# Altium PCB 电源板PCB.PcbDoc
Units mil, origin at the board's own origin, x right, y up, seen from the top; angles counter-clockwise.
Board outline 6000 x 4000 mil, 2 copper layers (Top Layer, Bottom Layer); 30 components, 22 nets, 76 pads, 0 vias.
Unrouted connection lines stored in the file: 54.
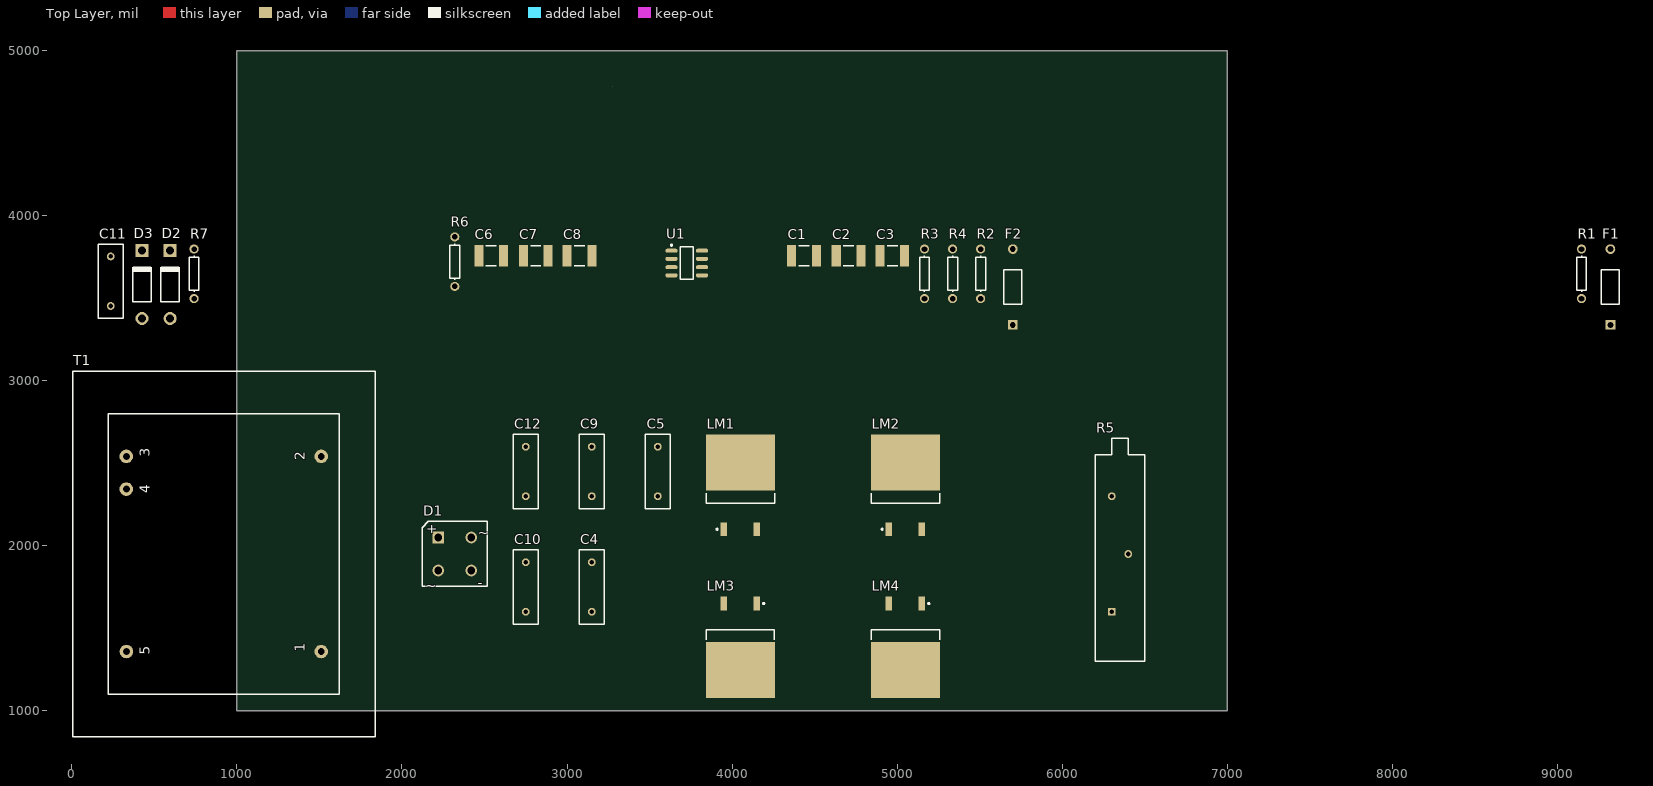
[diagram p0: Top Layer view]
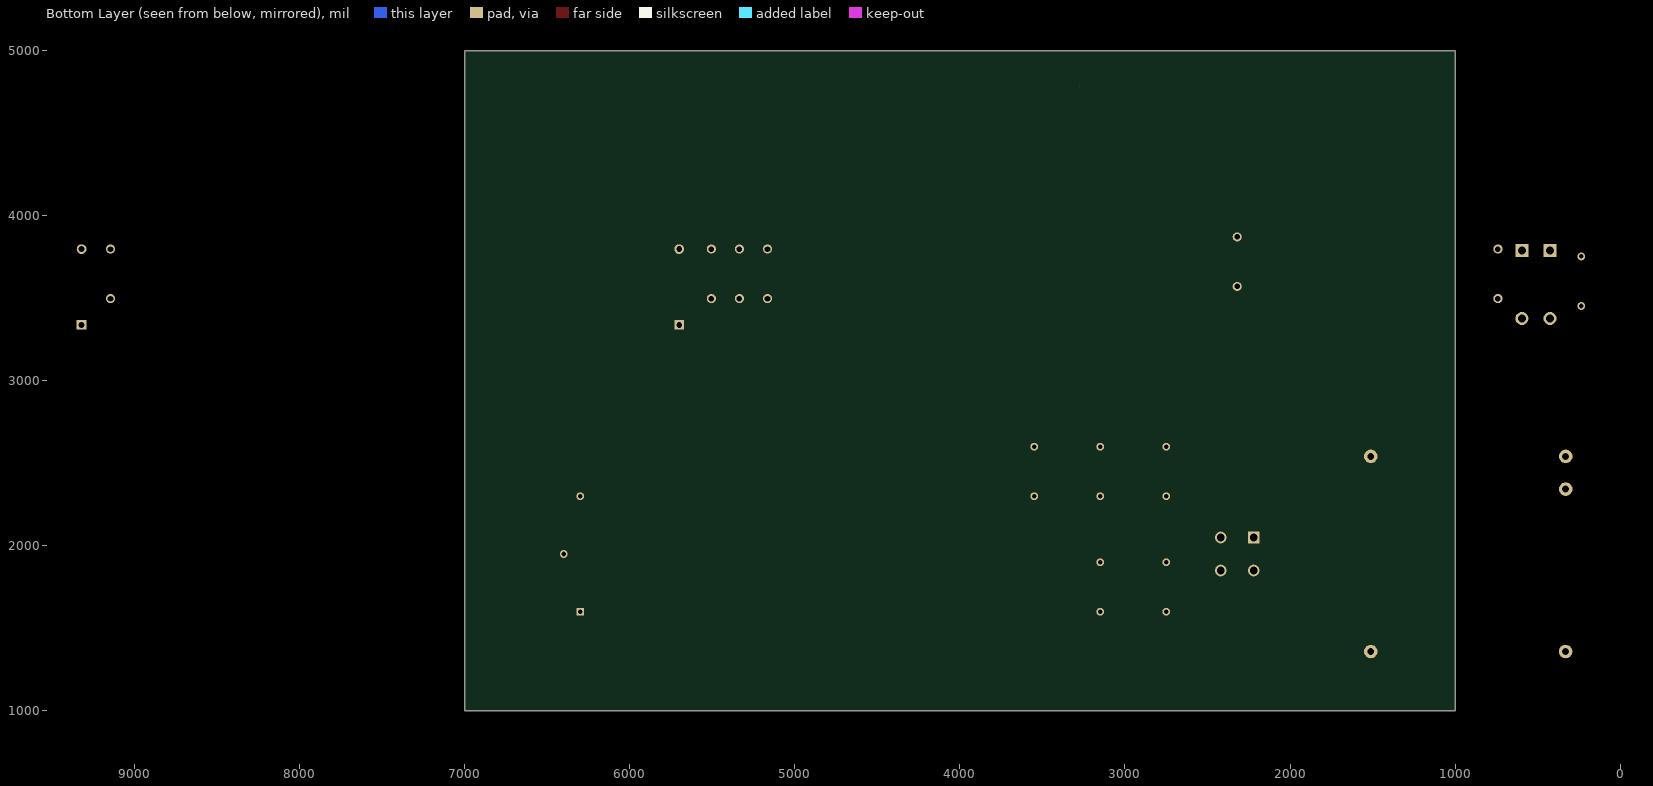
[diagram p1: Bottom Layer view, seen from below]

## Layer stack, top to bottom
Top Solder: solder mask 0.4, Solder Resist, Dk 3.5
Top Layer: signal copper 1.4
Dielectric 1: dielectric 12.6, FR-4, Dk 4.8
Bottom Layer: signal copper 1.4
Bottom Solder: solder mask 0.4, Solder Resist, Dk 3.5

## Board outline
1000,1000 7000,1000 7000,5000 1000,5000
cut-out: 3275,4780

## Design rules (kind name [scope] priority, off if disabled: settings)
Clearance [All] p1: gap=10 ignorepadtopadclearanceinfootprint=FALSE except(0: Arc-Hole Track-Hole SMDPad-Hole THPad-Hole Via-Hole Fill-Hole Poly-Hole Region-Hole Text-Hole)
PolygonConnect [All] p1: connectstyle=Relief reliefconductorwidth=10 reliefentries=4 polygonreliefangle="90 Angle" airgapwidth=10
RoomDefinition 电源板原理图 [InComponentClass('电源板原理图')] p1: confinementstyle=ConfineIn formatcopy=TRUE outline -24.58,-33.33 8760,-33.33 8760,300 -24.58,300
RoutingVias [All] p1: holewidth=28 width=50 viastyle="Through Hole" minholewidth=28 minwidth=50 maxholewidth=28 maxwidth=50
SolderMaskExpansion [All] p1: expansion=4
Width [All] p1: maxlimit=10 minlimit=10 preferedwidth=10
30 further rules are at their usual default settings.

## Components (designator, comment, footprint, x,y, rotation, side; value= is the part's Value field where it differs from the comment)
C1 "Cap Pol3" 1812 4435.42,3757.41 r0 top value=100pF
C2 "Cap Pol3" 1812 4705.42,3757.41 r0 top value=100pF
C3 "Cap Pol3" 1812 4970.42,3757.41 r0 top value=100pF
C4 "Cap" RAD-0.3 3150,1750 r90 top value=100pF
C5 "Cap" RAD-0.3 3550,2450 r90 top value=100pF
C6 "Cap Pol3" 1812 2540.42,3757.41 r0 top value=100pF
C7 "Cap Pol3" 1812 2810.42,3757.41 r0 top value=100pF
C8 "Cap Pol3" 1812 3075.42,3757.41 r0 top value=100pF
C9 "Cap" RAD-0.3 3150,2450 r90 top value=100pF
C10 "Cap" RAD-0.3 2750,1750 r90 top value=100pF
C11 "Cap" RAD-0.3 235.42,3602.41 r90 top value=100pF
C12 "Cap" RAD-0.3 2750,2450 r90 top value=100pF
D1 "Bridge1" D-38 2320,1950 r0 top
D2 "Diode 1N4007" DO-41 595.42,3582.41 r90 top
D3 "Diode 1N4007" DO-41 425.42,3582.41 r90 top
F1 "0.5A" PIN-W2/E2.8 9320.42,3567.41 r90 top
F2 "0.5A" PIN-W2/E2.8 5700.42,3567.41 r90 top
LM1 "LM7812" D2PAK_L 4050.42,2365.75 r90 top
LM2 "LM7805" D2PAK_L 5050,2365.75 r90 top
LM3 "LM7912" D2PAK_L 4050,1384.25 r270 top
LM4 "LM7905" D2PAK_L 5050,1384.25 r270 top
R1 "Res1" AXIAL-0.3 9145.42,3647.41 r90 top value=100
R2 "Res1" AXIAL-0.3 5505.42,3647.41 r90 top value=100
R3 "Res1" AXIAL-0.3 5165.42,3647.41 r90 top value=500
R4 "Res1" AXIAL-0.3 5335.42,3647.41 r90 top value=1K
R5 "Res Tap" VR3 6350,1950 r90 top value=1K
R6 "Res1" AXIAL-0.3 2320,3720.75 r90 top value=500
R7 "Res1" AXIAL-0.3 740.42,3647.41 r90 top value=1K
T1 "Trans CT Ideal" TRF_5 920.5,1950 r90 top
U1 "NE555D" D008_L 3725.42,3712.41 r0 top

## Footprints (in the part's own frame and the unit in brackets; to place one, negate y for a bottom-side part, rotate by r counter-clockwise, add the part's x,y. Pads: shape width x height; smd on the part's side, far side on the other; paste and mask are expansions set on the pad)
1812 [mm] "Chip Capacitor, Body 4.5x3.2mm, IPC High Density"
  rect 1.4x3.3 smd: 1(-1.9,0) 2(1.9,0)
  silkscreen extent -0.8,-1.55 0.8,1.55, body extent -2.4,-1.7 2.4,1.7, height 1.4
AXIAL-0.3 [mm] "Axial Device, Thru-Hole; 2 Leads; 0.3 in Pin Spacing"
  round 1.4 hole 0.85: 1(-3.81,0) 2(3.81,0)
  silkscreen extent -2.77,-0.76 2.77,0.76
D2PAK_L [mm] "D2-PAK, 4-Leads, Body 8.8x10.4mm, Pitch 2.54mm, Lead Span 15.1mm, IPC High Density"
  rect 2.1x1 smd: 1(-6.75,2.54) 3(-6.75,-2.54)
  rect 8.6x10.6 smd: 2(3.5,0)
  silkscreen extent -6.87,-5.25 -1.2,5.25, body extent -2.75,-5.28 6.25,5.28, height 4.69
D008_L [mm] "SOIC, 8-Leads, Body 4.9x3.9mm, Pitch 1.27mm, IPC High Density"
  oval 1.9x0.6 smd: 1(-2.35,1.905) 2(-2.35,0.635) 3(-2.35,-0.635) 4(-2.35,-1.905) 5(2.35,-1.905) 6(2.35,-0.635) 7(2.35,0.635) 8(2.35,1.905)
  silkscreen extent -2.47,-2.5 1,2.88, body extent -1.95,-2.45 1.95,2.45, height 1.75
D-38 [mm] "Bridge Rectifier; 4 Terminals; Body 9.4 x 9.4 mm (typ); Pitch 5.08 mm"
  rect 1.8x1.8 hole 1.2: 1(-2.54,2.54)
  round 1.8 hole 1.2: 2(-2.54,-2.54) 3(2.54,-2.54) 4(2.54,2.54)
  silkscreen extent -5,-5 5,5, body extent -5,-5 5,5, height 9.91
DO-41 [mm] "Diode, Axial; Body 5.2 x 2.7 mm (LxDia. max), Lead Dia. 0.86 mm (max)"
  round 2 hole 1.2: 1(-5.23,0)
  rect 2x2 hole 1.2: 2(5.23,0)
  silkscreen extent -2.65,-1.4 2.75,1.4
PIN-W2/E2.8 [mm] "Thru-Hole; 2 Leads"
  rect 1.5x1.5 hole 0.9: 1(-5.825,0)
  round 1.5 hole 0.9: 2(5.825,0)
  silkscreen extent -2.65,-1.4 2.65,1.4
RAD-0.3 [mm] "Radial Cap, Thru-Hole; 2 Leads; 0.3 in Pin Spacing"
  round 1.2 hole 0.7: 1(-3.81,0) 2(3.81,0)
  silkscreen extent -5.71,-1.91 5.71,1.91
TRF_5 [mil] "Transformer; 5 Leads"
  round 82 hole 42: 1(-590.83,-590.42) 2(590.83,-590.42) 3(590.83,590.42) 4(393.33,590.42) 5(-590.83,589.58)
  silkscreen extent -1108,-917 1108,916
VR3 [mm] "Thru-Hole; 3 Leads"
  rect 1.2x1.2 hole 0.7: 1(-8.89,1.27)
  round 1.2 hole 0.7: 2(0,-1.27) 3(8.89,1.27)
  silkscreen extent -16.51,-3.81 17.78,3.81

## Part data
C1 C2 C3 C6 C7 C8: "Polarized Capacitor (Surface Mount)", LatestRevisionDate=29-May-2009, LatestRevisionNote="IPC-7351 Footprint Added.", PackageDescription="Chip Capacitor", PackageReference=C0805, Published=8-Jun-2000, Publisher="Altium Limited"
C4 C5 C9 C10 C11 C12: "Capacitor", LatestRevisionDate=17-Jul-2002, LatestRevisionNote="Re-released for DXP Platform.", PackageDescription="Radial Cap, Thru-Hole; 2 Leads; 0.3 in Pin Spacing", PackageReference=RAD-0.3, Published=8-Jun-2000, Publisher="Altium Limited"
D1: "Full Wave Diode Bridge", DatasheetVersion=E2732B, LatestRevisionDate=29-May-2009, LatestRevisionNote="Sch pins A & K swapped.", PackageDescription="Bridge Rectifier; 4 Terminals; Body 9.4 x 9.4 mm (typ); Pitch 5.08 mm", PackageReference=D-38, Published=8-Jun-2000, Publisher="Altium Limited"
D2 D3: "1 Amp General Purpose Rectifier", Code_JEDEC=DO-204-AL, ComponentLink1Description="Manufacturer Link", ComponentLink1URL=http://www.fairchildsemi.com/, ComponentLink2Description=Datasheet, ComponentLink2URL=http://www.fairchildsemi.com/ds/1N%2F1N4001.pdf, DatasheetVersion=1998, LatestRevisionDate=17-Jul-2002, LatestRevisionNote="Re-released for DXP Platform.", PackageDescription="Diode, Axial; Body 5.2 x 2.7 mm (LxDia. max), Lead Dia. 0.86 mm (max)", PackageReference=DO-41, PackageVersion=Aug-1999, Published=8-Jun-2000, Publisher="Altium Limited"
F1 F2: library part "Fuse 1", "Fuse", LatestRevisionDate=17-Jul-2002, LatestRevisionNote="Re-released for DXP Platform.", PackageDescription="Thru-Hole; 2 Leads", PackageReference=PIN-W2/E2.8, Published=8-Jun-2000, Publisher="Altium Limited"
LM1 LM2 LM3 LM4: library part "Volt Reg", "Voltage Regulator", LatestRevisionDate=29-May-2009, LatestRevisionNote="IPC-7351 Footprint Added.", PackageDescription="3-Pin Transistor Outline Package 2.54 mm Pitch, 15.1 mm Lead Span", PackageReference=D2PAK, Published=24-Mar-1999, Publisher="Altium Limited"
R1 R2 R3 R4 R6 R7: "Resistor", LatestRevisionDate=17-Jul-2002, LatestRevisionNote="Re-released for DXP Platform.", PackageDescription="Axial Device, Thru-Hole; 2 Leads; 0.3 in Pin Spacing", PackageReference=AXIAL-0.3, Published=8-Jun-2000, Publisher="Altium Limited"
R5: "Tapped Resistor", LatestRevisionDate=17-Jul-2002, LatestRevisionNote="Re-released for DXP Platform.", PackageDescription="Variable Resistor, Thru-Hole; 3 Leads", PackageReference=VR3, Published=24-Mar-1999, Publisher="Altium Limited", Set Position=0.5, Sim Note="Enter the Resistance value and the set point into parameter fields."
T1: "Center-Tapped Transformer (Ideal)", LatestRevisionDate=17-Jul-2002, LatestRevisionNote="Re-released for DXP Platform.", PackageDescription="Transformer; 5 Leads", PackageReference=TRF_5, Published=8-Jun-2000, Publisher="Altium Limited"
U1: "Precision Timer", Code_IPC=SOIC127P600-8, ComponentLink1Description="Manufacturer Link", ComponentLink1URL=http://www.ti.com/, ComponentLink2Description=Datasheet, ComponentLink2URL=http://www-s.ti.com/sc/ds/ne555.pdf, DatasheetVersion=Feb-1992, LatestRevisionDate=13-Apr-2006, LatestRevisionNote="IPC-7351 Footprint Added.", PackageDescription="8-Pin Small Outline Integrated Circuit 1.27 mm Pitch", PackageReference=D008, PackageVersion=Jan-1998, Published=16-Jan-2001, Publisher="Altium Limited"

## Nets (pads, with @x,y where several pads share a name; then routed paths per layer and width w, separated by ;. In a path a pad name is that pad's centre, name@x,y a point inside that pad or via, vN(x,y) a via of type N, cw(c..) or ccw(c..) an arc to the next point about the centre after c; other vN are vias at no path point)
GND: C11.1 C12.1 T1.2 T1.4 U1.1
NetC1_1: C1.1 C4.2 D1.1 LM1.1
NetC1_2: C1.2 C2.2 C3.2 C4.1 C5.1 C6.1 C7.1 C8.1 C9.2 C10.2 LM1.2 LM2.2 LM3.2 LM4.2 R3.1 R6.2
NetC2_1: C2.1 C5.2 LM1.3 LM2.1
NetC3_1: C3.1 LM2.3 R3.2 R4.2 U1.4 U1.8
NetC6_2: C6.2 C9.1 D1.3 LM3.1
NetC7_2: C7.2 C10.1 LM3.3 LM4.1
NetC8_2: C8.2 LM4.3 R6.1
NetC11_2: C11.2 U1.5
NetC12_2: C12.2 D2.2 D3.1 U1.2 U1.6
NetD1_2: D1.2 F2.2
NetD1_4: D1.4 F1.2
NetD2_1: D2.1 R5.3 U1.7
NetD3_2: D3.2 R7.1
NetF1_1: F1.1 R1.2
NetF2_1: F2.1 R2.2
NetR1_1: R1.1 T1.3
NetR2_1: R2.1 T1.5
NetR4_1: R4.1 R5.1
NetR5_2: R5.2 R7.2
NetT1_1: T1.1
NetU1_3: U1.3

## Text inside footprints (layer, text, board x,y; h text height)
D1: Top Overlay "+" at 2146.38,2074.57 h59.06; Top Overlay "-" at 2460,1750 h59.05; Top Overlay "~" at 2140,1730 h59.05; Top Overlay "~" at 2460,2050 h59.05
T1: Top Overlay "2" at 1410.92,2519.17 h59.06 r90; Top Overlay "3" at 470.92,2539.17 h59.06 r90; Top Overlay "4" at 470.92,2319.17 h59.06 r90; Top Overlay "1" at 1410.92,1359.17 h59.06 r90; Top Overlay "5" at 470.92,1339.17 h59.06 r90